# Altium PCB PiModulos.PcbDoc
Units mil, origin at the board's own origin, x right, y up, seen from the top; angles counter-clockwise.
Board outline 3600 x 900 mil, 2 copper layers (Top Layer, Bottom Layer); 61 components, 38 nets, 136 pads, 11 vias.
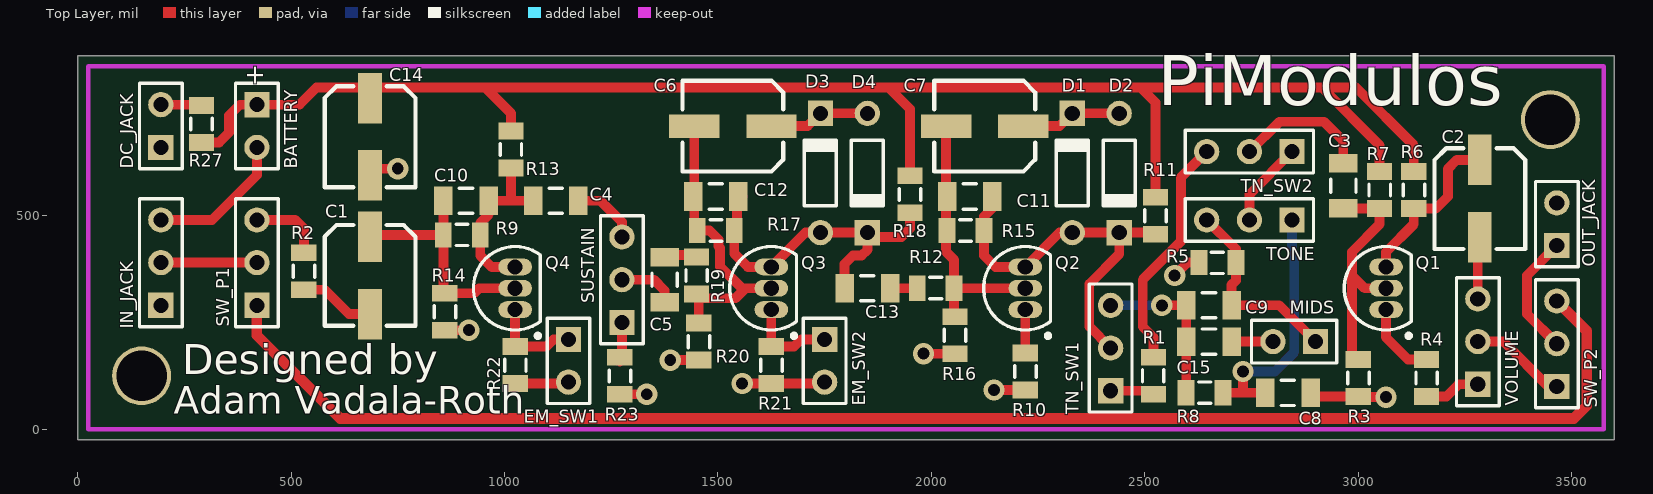
[diagram p0: Top Layer view]
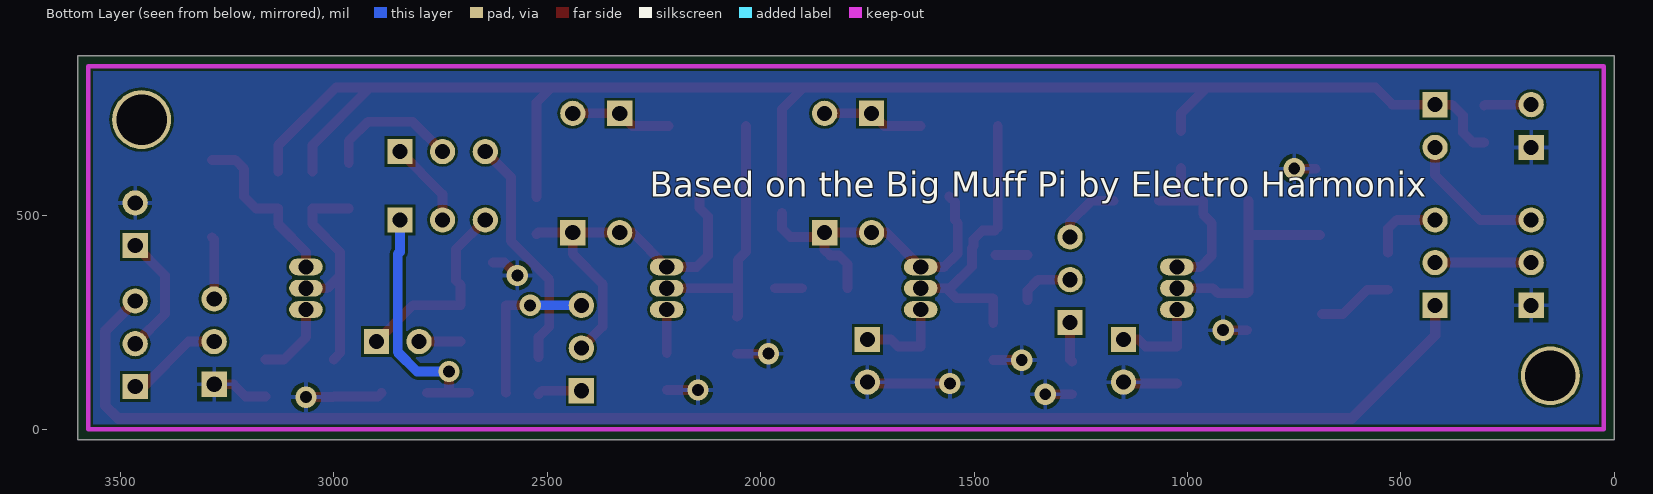
[diagram p1: Bottom Layer view, seen from below]

## Layer stack, top to bottom
Top Solder: solder mask 0.4, Solder Resist, Dk 3.5
Top Layer: signal copper 1.4
Dielectric1: dielectric 12.6, FR-4, Dk 4.8
Bottom Layer: signal copper 1.4
Bottom Solder: solder mask 0.4, Solder Resist, Dk 3.5

## Board outline
0,-25 0,875 3600,875 3600,-25

## Design rules (kind name [scope] priority, off if disabled: settings)
Clearance [All] p1: gap=6
ComponentClearance [All] p1: gap=0 collisioncheckmode=3 verticalgap=10 showdistances=FALSE
FanoutControl Fanout_SOIC [(InComponent('U8') AND InComponent('U7'))] p3: bgadir=Out bgaviamode=Centered fanoutstyle=Staggered fanoutdirection=Alternating viagrid=1 // Fanout_SOIC (Default Rule)
FanoutControl Fanout_Small [All] p4: bgadir=Out bgaviamode=Centered fanoutstyle=Auto fanoutdirection=Alternating viagrid=1 // Fanout_Small (Default Rule)
HoleSize [All] p1: absolutevalues=TRUE maxlimit=120 minlimit=1 maxpercent=80.000 minpercent=20.000
MinimumSolderMaskSliver [All] p1 off: minsoldermaskwidth=10
PlaneConnect [All] p1: planeconnectstyle=Direct reliefexpansion=20 reliefentries=4 reliefconductorwidth=10 reliefairgap=10
PolygonConnect [All] p1: connectstyle=Relief reliefconductorwidth=10 reliefentries=4 polygonreliefangle="90 Angle" airgapwidth=10
RoutingVias [All] p1: holewidth=15 width=25 viastyle="Through Hole" minholewidth=15 minwidth=25 maxholewidth=28 maxwidth=50
SilkToSilkClearance [All] p1 off: silktosilkclearance=10
SilkToSolderMaskClearance SilkscreenOverComponentPads [IsPad] p1 off: minsilkscreentomaskgap=10 clearancetoexposedcopper=TRUE
SolderMaskExpansion [All] p1: expansion=4
Width [All] p1: maxlimit=30 minlimit=6 preferedwidth=6 minimp=50.000000 maximp=50.000000 favimp=50.000000
22 further rules are at their usual default settings.

## Components (designator, comment, footprint, x,y, rotation, side; value= is the part's Value field where it differs from the comment)
BATTERY "Battery" BAT-2 420,710 r270 top
C1 "VS C 7.4mm" "Panasonic VS C" 800,240 r90 top
C2 "VS C 7.4mm" "Panasonic VS C" 3400,420 r90 top
C3 "1206" C1206 2965,570 r270 top
C4 "1206" C1206 1120,535 r0 top
C5 "1206" C1206 1375,350 r90 top
C6 "VS C 7.4mm" "Panasonic VS C" 1415,595 r0 top
C7 "VS C 7.4mm" "Panasonic VS C" 2005,595 r0 top
C8 "1206" C1206 2835,85 r180 top
C9 "1206" C1206 2650,290 r0 top
C10 "1206" C1206 910,535 r0 top
C11 "1206" C1206 2090,545 r0 top
C12 "1206" C1206 1495,545 r0 top
C13 "1206" C1206 1850,330 r0 top
C14 "VS C 7.4mm" "Panasonic VS C" 800,565 r90 top
C15 "1206" C1206 2650,205 r0 top
D1 "1N914" DO-35 2330,600 r90 top
D2 "1N914" DO-35 2440,600 r270 top
D3 "1N914" DO-35 1740,600 r90 top
D4 "1N914" DO-35 1850,600 r270 top
DC_JACK "Header 2" HDR1X2 195,660 r90 top
EM_SW1 "Header 2" HDR1X2 1150,210 r270 top
EM_SW2 "Header 2" HDR1X2 1750,210 r270 top
IN_JACK "Header 3" HDR1X3 195,290 r90 top
MIDS "Header 2" HDR1X2 2900,205 r180 top
OUT_JACK "Header 2" HDR1X2 3465,430 r90 top
Q1 "2N3904" TO-92A 3065,330 r0 top
Q2 "2N3904" TO-92A 2220,330 r0 top
Q3 "2N3904" TO-92A 1625,330 r0 top
Q4 "2N3904" TO-92A 1025,330 r0 top
R1 "0805" "SM 0805 - gap trimmed" 2520,125 r270 top
R2 "0805" "SM 0805 - gap trimmed" 530,370 r90 top
R3 "0805" "SM 0805 - gap trimmed" 3000,120 r90 top
R4 "0805" "SM 0805 - gap trimmed" 3160,120 r90 top
R5 "0805" "SM 0805 - gap trimmed" 2670,390 r0 top
R6 "0805" "SM 0805 - gap trimmed" 3130,560 r90 top
R7 "0805" "SM 0805 - gap trimmed" 3050,560 r90 top
R8 "0805" "SM 0805 - gap trimmed" 2640,85 r180 top
R9 "0805" "SM 0805 - gap trimmed" 900,455 r180 top
R10 "0805" "SM 0805 - gap trimmed" 2220,135 r90 top
R11 "0805" "SM 0805 - gap trimmed" 2525,500 r90 top
R12 "0805" "SM 0805 - gap trimmed" 2010,330 r180 top
R13 "0805" "SM 0805 - gap trimmed" 1015,655 r270 top
R14 "0805" "SM 0805 - gap trimmed" 860,275 r90 top
R15 "0805" "SM 0805 - gap trimmed" 2080,465 r180 top
R16 "0805" "SM 0805 - gap trimmed" 2055,220 r90 top
R17 "0805" "SM 0805 - gap trimmed" 1495,465 r180 top
R18 "0805" "SM 0805 - gap trimmed" 1950,550 r90 top
R19 "0805" "SM 0805 - gap trimmed" 1450,360 r90 top
R20 "0805" "SM 0805 - gap trimmed" 1455,205 r90 top
R21 "0805" "SM 0805 - gap trimmed" 1625,150 r90 top
R22 "0805" "SM 0805 - gap trimmed" 1025,150 r90 top
R23 "0805" "SM 0805 - gap trimmed" 1270,125 r90 top
R27 "0805" "SM 0805 - gap trimmed" 290,715 r90 top
SUSTAIN "Header 3" HDR1X3 1275,250 r90 top
SW_P1 "Header 3" HDR1X3 420,290 r90 top
SW_P2 "Header 3" HDR1X3 3465,100 r90 top
TN_SW1 "Header 3" HDR1X3 2420,90 r90 top
TN_SW2 "Header 3" HDR1X3 2845,650 r180 top
TONE "Header 3" HDR1X3 2845,490 r180 top
VOLUME "Header 3" HDR1X3 3280,105 r90 top

## Footprints (in the part's own frame and the unit in brackets; to place one, negate y for a bottom-side part, rotate by r counter-clockwise, add the part's x,y. Pads: shape width x height; smd on the part's side, far side on the other; paste and mask are expansions set on the pad)
BAT-2 [mm] "Battery; 2 Leads"
  rect 1.5x1.5 hole 0.9: 1(-1.27,0)
  round 1.5 hole 0.9: 2(1.27,0)
  silkscreen extent -2.54,-1.27 2.54,1.27
C1206 [mm] "Chip Capacitor, Body 3.2x1.6mm, IPC High Density"
  rect 1.1x1.7 smd: 1(-1.35,0) 2(1.35,0)
  silkscreen extent -0.4,-0.75 0.4,0.75, body extent -1.7,-0.9 1.7,0.9, height 1.3
DO-35 [mm] "Diode, Axial; Body 3.8 x 1.9 mm (LxDia. max), Lead Dia. 0.53 mm (max)"
  round 1.5 hole 0.9: 1(-3.55,0)
  rect 1.5x1.5 hole 0.9: 2(3.55,0)
  silkscreen extent -1.95,-0.95 2.05,0.95
HDR1X2 [mm] "Connector; Header; 2 Position"
  rect 1.5x1.5 hole 0.9: 1(0,0)
  round 1.5 hole 0.9: 2(2.54,0)
  silkscreen extent -1.27,-1.27 3.81,1.27
HDR1X3 [mm] "Connector; Header; 3 Position"
  rect 1.5x1.5 hole 0.9: 1(0,0)
  round 1.5 hole 0.9: 2(2.54,0) 3(5.08,0)
  silkscreen extent -1.27,-1.27 6.35,1.27
"Panasonic VS C" [mm]
  rect 3x1.4 smd: 1(5.348,2.921) 2(0.748,2.921)
  silkscreen extent 0.05,0.22 6.05,5.62, body extent 0.1,0.29 6,5.59, height 5.41
"SM 0805 - gap trimmed" [mm]
  rect 1x1.5 smd: 1(-1.1,0) 2(1.1,0)
  silkscreen extent -0.36,-0.64 0.35,0.63
TO-92A [mm] "TO, Flat Index; 3 In-Line, Axial Leads; Body Dia. 4.5mm; Leads 0.51 x 0.48 mm (max)"
  oval 2x1 hole 0.9: 1(0,-1.27) 2(0,0) 3(0,1.27)
  silkscreen extent -2.48,-2.95 1.5,2.48, body extent -2.48,-2.5 1.5,2.5, height 6.86

## Part data
BATTERY: "Multicell Battery"
C1 C2 C6 C7 C14: library part "Cap Pol1", "Polarized Capacitor (Radial)"
C3 C4 C5 C8 C9 C10 C11 C12 C13 C15: library part "Cap Semi", "Capacitor (Semiconductor SIM Model)"
D1 D2 D3 D4: library part "Diode 1N914", "High Conductance Fast Diode"
DC_JACK EM_SW1 EM_SW2 MIDS OUT_JACK: "Header, 2-Pin"
IN_JACK SUSTAIN SW_P1 SW_P2 TN_SW1 TN_SW2 TONE VOLUME: "Header, 3-Pin"
Q1 Q2 Q3 Q4: "NPN General Purpose Amplifier"
R1 R2 R3 R4 R5 R6 R7 R8 R9 R10 R11 R12 R13 R14 R15 R16 R17 R18 R19 R20 R21 R22 R23 R27: library part Res3, "Resistor"

## Free pads (board coordinates)
  round 137.8 hole 118.11: ""(150,125) ""(3450,725)

## Via types
v1: diameter 50, hole 28, Top Layer to Bottom Layer, tented both sides, 11 vias

## Nets (pads, with @x,y where several pads share a name; then routed paths per layer and width w, separated by ;. In a path a pad name is that pad's centre, name@x,y a point inside that pad or via, vN(x,y) a via of type N, cw(c..) or ccw(c..) an arc to the next point about the centre after c; other vN are vias at no path point)
9VCC: BATTERY.1 C14.1 R6.2 R7.2 R11.2 R13.1 R18.2 R27.1 | length 3896.9
  Top Layer w23: R27.1@305,671.69 331.69,671.69 355,695 355,735 380,760 BATTERY.1 520,760 560,800 955,800 ; R13.1 1015,740 955,800 ; R18.2 1950,750 1900,800 ; R11.2 2525,765 2490,800 ; 2915,800 3050,665 R7.2 ; R6.2 3130,665 2995,800 2490,800 ; 955,800 1900,800 ; 1900,800 2490,800
GND: C8.1 C14.2 DC_JACK.1 EM_SW1.2 EM_SW2.2 IN_JACK.1 OUT_JACK.2 R3.1 R4.1 R5.1 R10.1 R14.1 R16.1 R20.1 R21.1 R22.1 R23.1 VOLUME.1 | length 1083.2
  Top Layer w23: C14.2@700.55,610 v1(750,610) ; R14.1 v1(916.69,231.69) ; R22.1 1146.69,106.69 EM_SW1.2 ; R23.1 v1(1333.31,81.69) ; v1(1388.31,161.69) R20.1 ; v1(1556.69,106.69) R21.1 1746.69,106.69 EM_SW2.2 ; v1(1981.69,176.69) R16.1 ; v1(2146.69,91.69) R10.1 ; v1(2570,360) 2600,390 R5.1 ; C8.1 2896.46,76.69 R3.1 ; R3.1@3001.69,75 v1(3065,75) ; R4.1 3206.69,76.69 3235,105 VOLUME.1
INPUT: IN_JACK.2 SW_P1.2 | length 225
  Top Layer w23: IN_JACK.2 SW_P1.2
NetBATTERY_2: BATTERY.2 IN_JACK.3 | length 333.5
  Top Layer w23: IN_JACK.3 315,490 420,595 BATTERY.2
NetC1_1: C1.1 C10.1 Q4.2 R9.2 R14.2 | length 561.4
  Top Layer w10: C1.1 C1.1@689.45,455 ; R14.2@856.85,321.46 R14.2
  Top Layer w23: C1.1@689.45,455 R9.2 ; R14.2@856.85,321.46 C10.1 ; R14.2 928.31,318.31 940,330 Q4.2
NetC1_2: C1.2 R2.1 | length 178.7
  Top Layer w23: R2.1 578.31,326.69 635.55,269.45 C1.2
NetC2_1: C2.1 Q1.3 R6.1 | length 403.9
  Top Layer w23: Q1.3 3065,415 3130,480 R6.1 3181.69,516.69 3210,545 3210,610 3230.55,630.55 C2.1
NetC2_2: C2.2 VOLUME.3 | length 146.5
  Top Layer w23: VOLUME.3 3280,444.45 C2.2
NetC3_1: C3.1 TN_SW2.2 | length 319.5
  Top Layer w23: TN_SW2.2 2815,720 2920,720 2965,675 C3.1
NetC3_2: C3.2 Q1.2 R3.2 R7.1 | length 564
  Top Layer w23: C3.2 3049.84,516.85 R7.1 3050,480 2985,415 2985,178.31 R3.2 ; 2985,360 3015,330 Q1.2
NetC4_1: C4.1 C10.2 Q4.3 R9.1 R13.2 | length 409.7
  Top Layer w23: 1015,535 R13.2 ; Q4.3 970,380 943.31,406.69 R9.1 943.31,483.31 963.15,503.15 C10.2 C4.1
NetC4_2: C4.2 SUSTAIN.3 | length 157.6
  Top Layer w23: C4.2 1225,535 1275,485 SUSTAIN.3
NetC5_1: C5.1 SUSTAIN.2 | length 133.5
  Top Layer w23: SUSTAIN.2 1350,350 1375,325 C5.1@1375,301.85
NetC5_2: C5.2 R19.2 | length 75
  Top Layer w23: C5.2@1375,408.15 R19.2@1450,408.15
NetC6_1: C6.1 D3.2 D4.1 | length 236.8
  Top Layer w23: C6.1 1710.24,710 D3.2 D4.1
NetC6_2: C6.2 C12.1 Q3.2 R17.2 R19.1 R20.2 | length 689.7
  Top Layer w23: C6.2 1444.45,472.24 R17.2 1480,465 1501.12,443.88 1501.12,428.22 1505,424.35 1505,381.16 1556.16,330 1565,330 ; R20.2 1455,306.69 1541.69,306.69 1565,330 ; Q3.2 1565,330
NetC7_1: C7.1 D1.2 D2.1 | length 236.8
  Top Layer w23: C7.1 2300.24,710 D1.2 D2.1
NetC7_2: C7.2 C11.1 Q2.2 R12.1 R15.2 R16.2 | length 621.9
  Top Layer w23: C7.2 2034.45,415.55 2053.31,396.69 R12.1 ; R16.2 2053.31,265 R12.1 ; Q2.2 R12.1
NetC8_2: C8.2 R8.1 TONE.1 | length 594.3
  Top Layer w23: R8.1 C8.2 ; 2730,90 v1(2730,135)
  Bottom Layer w23: v1(2730,135) 2805,135 2850,180 2850,410 2845,415 TONE.1
NetC9_1: C9.1 C15.1 R8.2 TN_SW1.3 | length 381.9
  Top Layer w23: v1(2540,290) C9.1 C15.1 2596.85,85.16 R8.2
  Bottom Layer w23: TN_SW1.3 v1(2540,290)
NetC9_2: C9.2 MIDS.1 R5.2 TONE.3 | length 464.6
  Top Layer w23: TONE.3 2713.31,421.69 R5.2 2713.31,348.31 2703.15,338.15 C9.2 2815,290 MIDS.1
NetC11_2: C11.2 D1.1 D2.2 Q2.3 R11.1 R15.1 TN_SW1.2 | length 913.9
  Top Layer w23: C11.2 2143.15,518.15 2123.31,498.31 R15.1 2123.31,406.69 2150,380 Q2.3 2300.24,460.24 D1.1 D2.2 ; TN_SW1.2 2370,240 2370,340 2440,410 D2.2 ; R11.1 2521.46,460.24 D2.2
NetC12_2: C12.2 C13.1 D3.1 D4.2 Q3.3 R17.1 R18.1 | length 812.8
  Top Layer w23: C12.2@1558.15,545 1545,531.85 1545,490 1538.31,483.31 R17.1 1538.31,411.69 1570,380 Q3.3 1705.24,460.24 D3.1 D4.2 ; C13.1 1796.85,386.85 1816.71,406.71 1836.71,406.71 1850,420 D4.2 ; R18.1 1950,470 1930,450 1860.24,450 D4.2
NetC13_2: C13.2 R12.2 | length 63.5
  Top Layer w23: C13.2 R12.2
NetC15_2: C15.2 MIDS.2 | length 96.9
  Top Layer w23: C15.2 MIDS.2
NetDC_JACK_2: DC_JACK.2 R27.2 | length 110.7
  Top Layer w23: DC_JACK.2 303.31,760 R27.2@305,758.31
NetEM_SW1_1: EM_SW1.1 Q4.1 R22.2 | length 218.6
  Top Layer w23: Q4.1 R22.2 1098.31,193.31 1115,210 EM_SW1.1
NetEM_SW2_1: EM_SW2.1 Q3.1 R21.2 | length 218.6
  Top Layer w23: Q3.1 R21.2 1678.31,193.31 1695,210 EM_SW2.1
NetQ1_1: Q1.1 R4.2 | length 181.4
  Top Layer w23: Q1.1 3065,215 3116.69,163.31 R4.2
NetQ2_1: Q2.1 R10.2 | length 101.7
  Top Layer w23: R10.2 Q2.1
NetR1_1: R1.1 TN_SW2.3 | length 554.2
  Top Layer w23: R1.1 2520,215 2495,240 2495,350 2585,440 2585,590 TN_SW2.3
NetR1_2: R1.2 TN_SW1.1 | length 103.4
  Top Layer w23: TN_SW1.1 2511.69,90 R1.2
NetR2_2: R2.2 SW_P1.3 | length 175
  Top Layer w23: SW_P1.3 510,490 530,470 R2.2
NetR23_2: R23.2 SUSTAIN.1 | length 93.8
  Top Layer w23: R23.2@1270,158.31 1275,163.31 SUSTAIN.1
NetSW_P2_1: SW_P2.1 VOLUME.2 | length 228.5
  Top Layer w23: VOLUME.2 3340,205 3445,100 SW_P2.1
NetTN_SW2_1: TN_SW2.1 TONE.2 | length 201.4
  Top Layer w23: TONE.2 2745,550 TN_SW2.1
OUTPUT: OUT_JACK.1 SW_P2.2 | length 288
  Top Layer w23: SW_P2.2 3395,270 3395,360 OUT_JACK.1
TRU_BYPASS: SW_P1.1 SW_P2.3 | length 3552.2
  Top Layer w25: SW_P1.1 420,220 615,25 3505,25 3535,55 3535,230 SW_P2.3

## Polygon pours and split planes (outlines as drawn)
GND on Bottom Layer "Top Layer-No Net" (solid, remove dead copper, pour order 2): 0,875 0,-25 100,-25 3600,-25 3600,45 3595,50 3600,55 3600,65 3600,875

## Keep-outs
Keep-Out Layer:
  lines w10: 25,0 3575,0 3575,850 25,850 25,0

## Silkscreen, mask and mechanical layers (free items; w line width, h text height)
Top Overlay:
  text "PiModulos" at 2530,720 h200
  text "Designed by" at 245,105 h120
  text "Adam Vadala-Roth" at 225,15 h110
Bottom Overlay:
  text "Based on the Big Muff Pi by Electro Harmonix" at 2260,525 h100
Mechanical 15:
  the board outline again, w10

## Text inside footprints (layer, text, board x,y; h text height)
BATTERY: Top Overlay "+" at 397.28,854.49 h45.28 r270